# Altium PCB bbr18_motor_battery_connection_board.PcbDoc
Units mm, origin at the board's own origin, x right, y up, seen from the top; angles counter-clockwise.
Board outline 22 x 16 mm, 2 copper layers (Top Layer, Bottom Layer), stack 1.571 mm thick; 4 components, 8 nets, 17 pads, 18 vias.
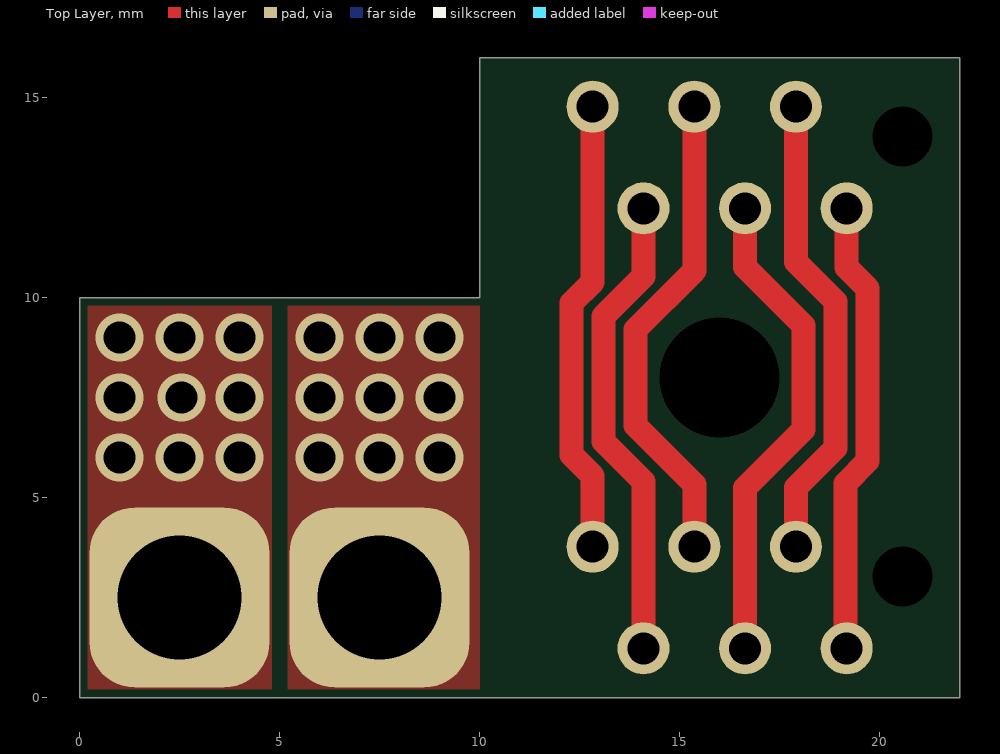
[diagram p0: Top Layer view]
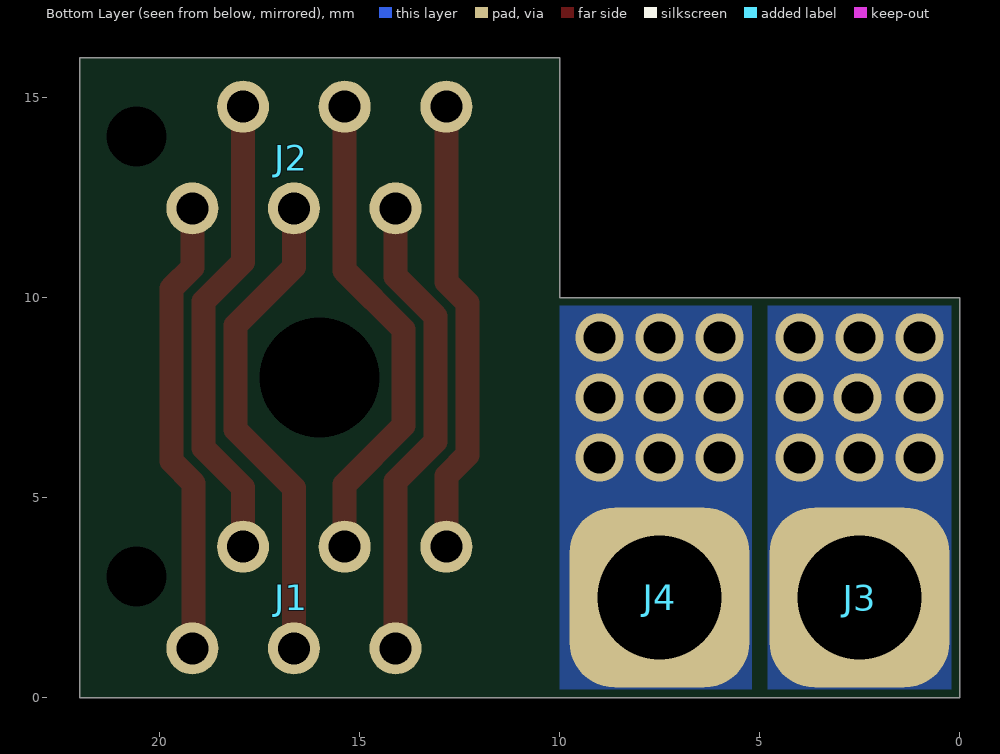
[diagram p1: Bottom Layer view, seen from below]

## Layer stack, top to bottom
Top Solder: solder mask 0.0102, Solder Resist, Dk 3.5
Top Layer: signal copper 0.0356
Dielectric 1: dielectric 1.5, FR-4, Dk 4.8
Bottom Layer: signal copper 0.0356
Bottom Solder: solder mask 0.0102, Solder Resist, Dk 3.5

## Board outline
0,0 22,0 22,16 10,16 10,10 0,10

## Design rules (kind name [scope] priority, off if disabled: settings)
BoardOutlineClearance [All] p1: gap=0.2 ignorepadtopadclearanceinfootprint=FALSE except(0: Arc-SplitContinuation Track-SplitContinuation SMDPad-SplitContinuation THPad-SplitContinuation Via-SplitContinuation Fill-SplitContinuation Poly-SplitContinuation Region-SplitContinuation Text-SplitContinuation)
Clearance ClearanceKeepOut [All vs OnLayer('Keep-Out Layer')] p1: gap=0.1 ignorepadtopadclearanceinfootprint=FALSE
Clearance [All] p2: gap=0.2 ignorepadtopadclearanceinfootprint=FALSE
ComponentClearance NetTieClearance [HasFootprint('NET-TIE-0602')] p1: gap=0 collisioncheckmode=3 verticalgap=0 showdistances=FALSE
ComponentClearance [All] p2: gap=0.2 collisioncheckmode=3 verticalgap=0.2 showdistances=FALSE
DiffPairsRouting [All] p1: maxlimit=0.3 minlimit=0.2 mostfreqgap=0.2 toplayer_minwidth=0.2 toplayer_maxwidth=1 toplayer_prefwidth=0.3 bottomlayer_minwidth=0.2 bottomlayer_maxwidth=1 bottomlayer_prefwidth=0.3 maxuncoupledlength=12.7
HoleSize [All] p1: absolutevalues=TRUE maxlimit=5 minlimit=0.3 maxpercent=80.000 minpercent=20.000
HoleToHoleClearance [All] p1: gap=0.2 allowstackedmicrovias=TRUE
MinimumSolderMaskSliver [All] p1: minsoldermaskwidth=0.2
PolygonConnect [All] p1: connectstyle=Direct reliefconductorwidth=0.254 reliefentries=4 polygonreliefangle="90 Angle" airgapwidth=0.254
RoomDefinition bbr18_motor_battery_connection_board [InComponentClass('bbr18_motor_battery_connection_board')] p1: confinementstyle=ConfineIn formatcopy=TRUE lockcomponents=FALSE outline -20,-16 61.6,-16 61.6,44 -20,44
RoutingVias [All] p1: holewidth=0.3 width=0.6 viastyle="Through Hole" minholewidth=0.3 minwidth=0.6 maxholewidth=2 maxwidth=3
SolderMaskExpansion SolderMaskExpansionVia [IsVia And (Not IsTestpoint)] p1: expansion=-5
SolderMaskExpansion [All] p2: expansion=0.1
Width [All] p1: maxlimit=5 minlimit=0.2 preferedwidth=0.3
25 further rules are at their usual default settings.

## Components (designator, comment, footprint, x,y, rotation, side; value= is the part's Value field where it differs from the comment)
J1 "HEADER-6" MICRO-MATCH-FOB-06 19.18,1.23 r0 bottom
J2 "HEADER-6" MICRO-MATCH-FOB-06 19.18,12.23 r0 bottom
J3 "HEADER-1" 2MM-BANANA-VIA 2.5,2.5 r180 bottom
J4 "HEADER-1" 2MM-BANANA-VIA 7.5,2.5 r180 bottom

## Footprints (in the part's own frame and the unit in brackets; to place one, negate y for a bottom-side part, rotate by r counter-clockwise, add the part's x,y. Pads: shape width x height; smd on the part's side, far side on the other; paste and mask are expansions set on the pad)
2MM-BANANA-VIA [mm]
  rrect50% 4.5x4.5 hole 3.1: 1(0,0)
  body extent -2,-2 2,2, height 1.51
MICRO-MATCH-FOB-06 [mm]
  round 1.3 hole 0.8: 1(0,0) 2(-1.27,-2.54) 3(-2.54,0) 4(-3.81,-2.54) 5(-5.08,0) 6(-6.35,-2.54)
  round 0 hole 1.5 unplated: drill(1.4,-1.8)
  body extent -7.95,-3.77 1.6,1.23, height 4

## Free pads (board coordinates)
  round 0 hole 3: 2(16,8)

## Via types
v1: diameter 1.2, hole 0.8, Top Layer to Bottom Layer, 18 vias

## Nets (pads, with @x,y where several pads share a name; then routed paths per layer and width w, separated by ;. In a path a pad name is that pad's centre, name@x,y a point inside that pad or via, vN(x,y) a via of type N, cw(c..) or ccw(c..) an arc to the next point about the centre after c; other vN are vias at no path point)
BAT+: J3.1
  other v1: 1,6 2.5,6 4,6 1,7.5 2.55,7.5 4,7.5 1,9 2.5,9 4,9
BAT-: J4.1
  other v1: 6,6 7.5,6 9,6 6,7.5 7.5,7.5 9,7.5 6,9 7.5,9 9,9
NetJ1_1: J1.1 J2.1 | length 11.5
  Top Layer w0.6: J1.1 19.146,1.264 19.146,5.354 19.7,5.909 19.7,10.231 19.18,10.751 J2.1
NetJ1_2: J1.2 J2.2 | length 11.8
  Top Layer w0.6: J1.2 17.91,5.25 18.9,6.24 18.9,9.9 17.91,10.89 J2.2
NetJ1_3: J1.3 J2.3 | length 12.2
  Top Layer w0.6: J1.3 16.64,5.24 18.1,6.7 18.1,9.3 16.64,10.76 J2.3
NetJ1_4: J1.4 J2.4 | length 12.2
  Top Layer w0.6: J1.4 15.37,5.33 13.9,6.8 13.9,9.2 15.37,10.67 J2.4
NetJ1_5: J1.5 J2.5 | length 11.8
  Top Layer w0.6: J1.5 14.1,5.4 13.1,6.4 13.1,9.531 14.1,10.531 J2.5
NetJ1_6: J1.6 J2.6 | length 11.4
  Top Layer w0.6: J1.6 12.83,5.539 12.3,6.069 12.3,9.863 12.83,10.393 J2.6
pads on no net: J1.drill J2.drill

## Polygon pours and split planes (outlines as drawn)
BAT- on Top Layer "Top Layer-NetJ3_1" (solid, remove dead copper, pour order 2): 5.2,0 10,0 10,10 5.2,10
BAT+ on Top Layer "Top Layer-NetJ5_1" (solid, remove dead copper, pour order 0): 0,0 0,10 4.8,10 4.8,0
BAT+ on Bottom Layer "Bottom Layer-NetJ5_1" (solid, remove dead copper, pour order 4): 0.2,0 0.2,10 4.8,10 4.8,0
BAT- on Bottom Layer "Bottom Layer-NetJ3_1" (solid, remove dead copper, pour order 6): 5.2,0 10,0 10,10 5.2,10
no net on Bottom Solder "NONET_L-01_P-001" (solid): 5.2,0 10,0 10,10 5.2,10
no net on Bottom Solder "NONET_L-01_P-001" (solid): 0.2,0 0.2,10 4.8,10 4.8,0

## Silkscreen, mask and mechanical layers (free items; w line width, h text height)
Mechanical 1:
  the board outline again, w0.1